# EAGLE board Lu_hw2 (EAGLE 7.5.0)
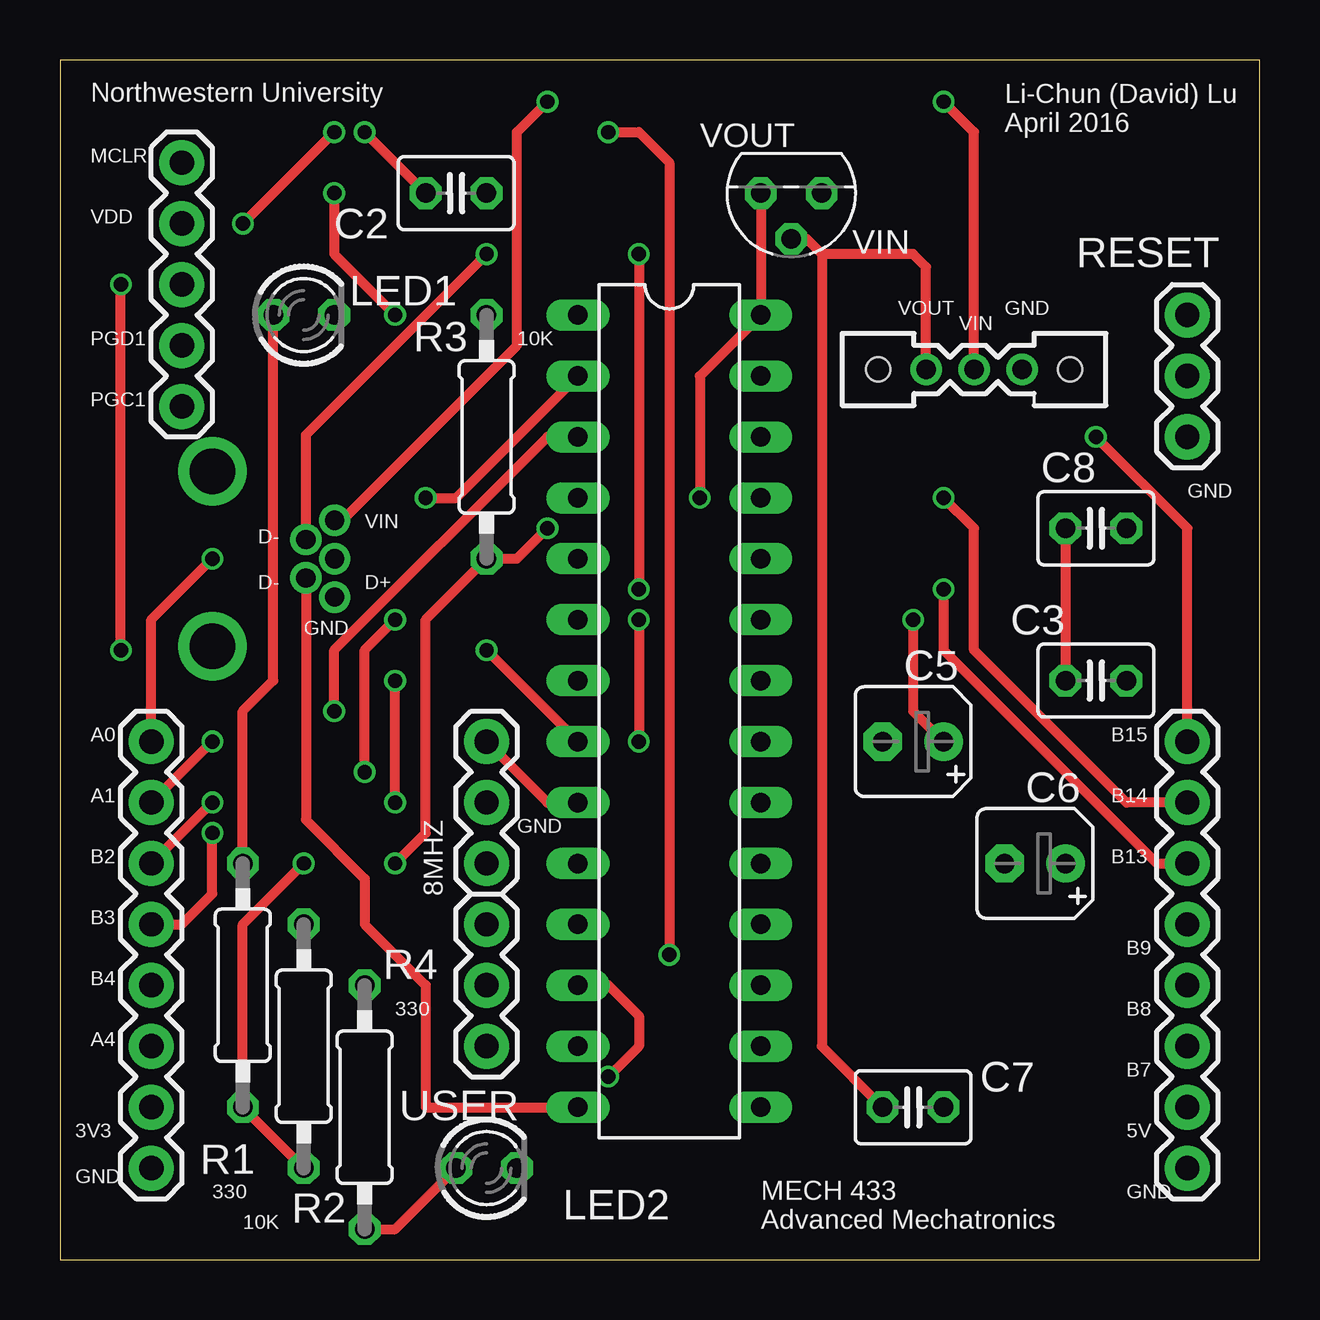
[diagram p0: board, top side]
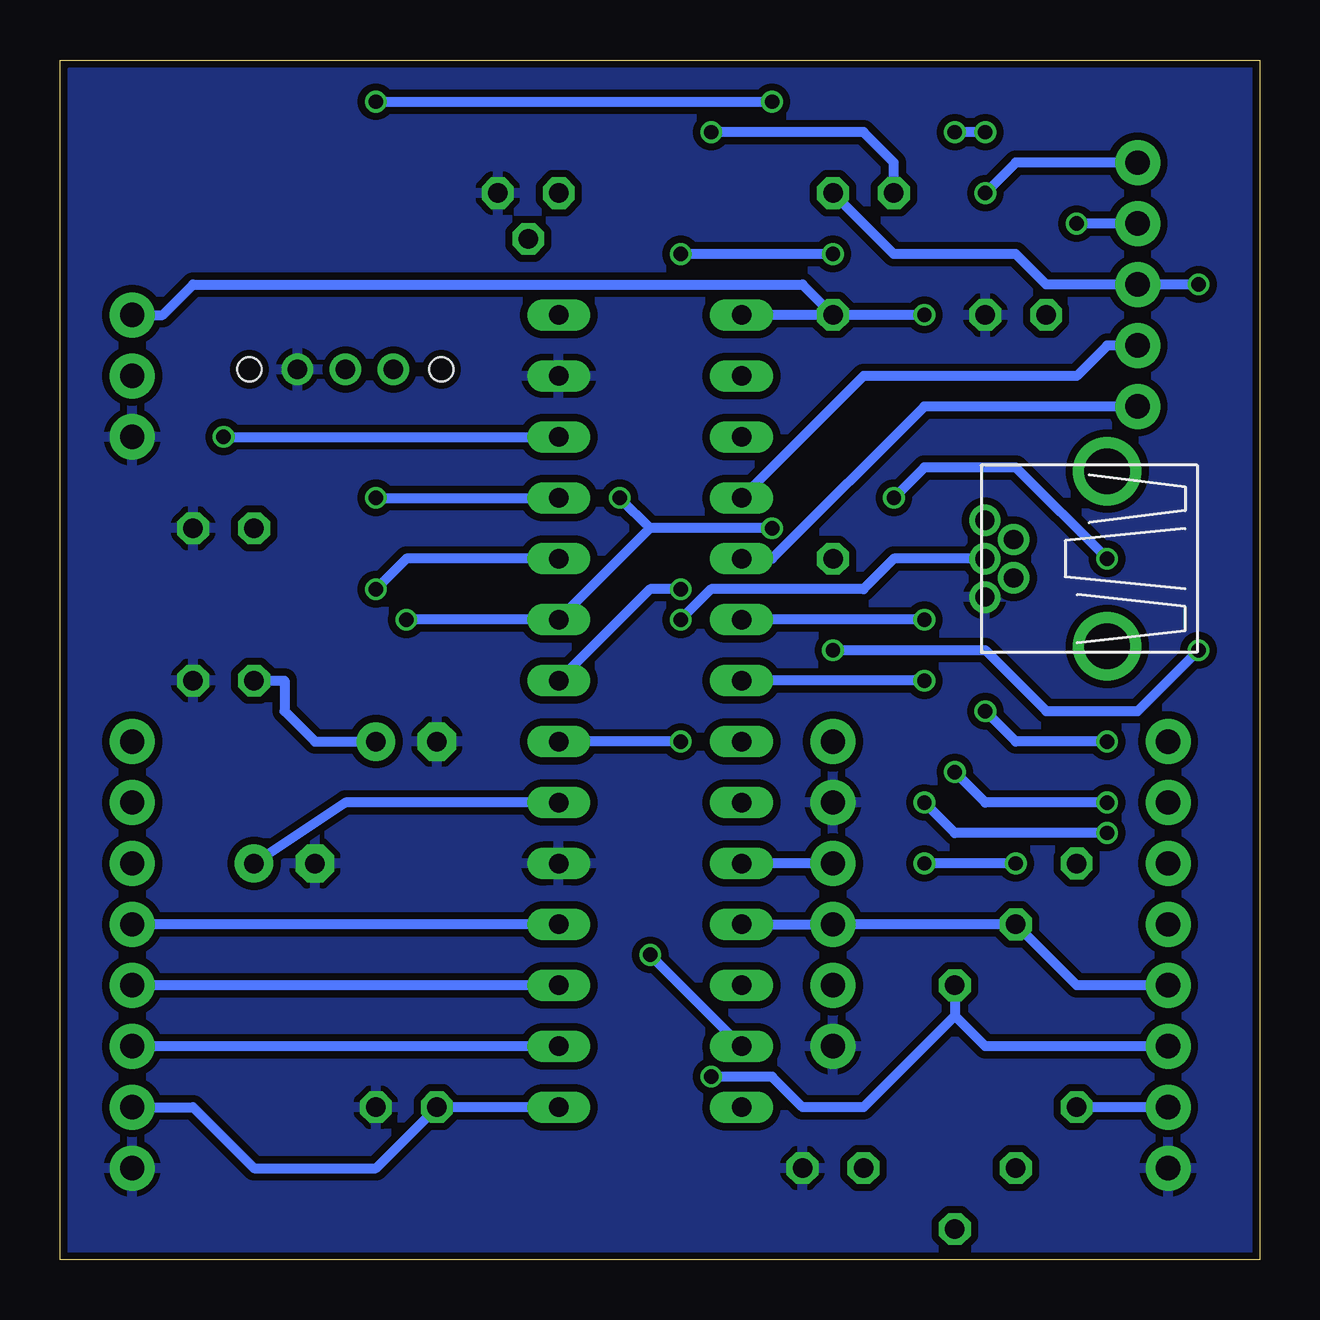
[diagram p1: board, bottom side, seen from below]

Size 50 x 50 mm. Coordinates in mm from the lower left corner, seen from the top.
Outline: 0,0 50,0 50,50 0,50 0,0
Copper layers (1*16): Top 0.035mm / dielectric 1.5mm / Bottom 0.035mm
Design rules "SeeedStudio_2layer_DRU_no_angle_20140221": minimum track width 6mil, minimum drill 12mil, track to track 6mil, track to pad 6mil, pad to pad 6mil, via to via 6mil, smd to smd 0mil, copper to edge 10mil, drill to drill 10mil, minimum pad ring 10mil, minimum via ring 6mil, stop-mask expansion 2mil, vias tented up to drill 100mil, thermal gap 10mil

## Footprints (pad centres in the part's own frame; a part is rotated, then mirrored left to right if it is on the bottom)
1X03 = drill 1.016 pad 1.88: 1 0,0; 2 2.54,0; 3 5.08,0
C025-030X050 = drill 0.813 octagon: 1 -1.27,0; 2 1.27,0
B45181A = drill 0.813 pad 1.6: + -1.27,0 | drill 0.813 pad 1.6 octagon: - 1.27,0
1X08_ROUND = drill 1.016 pad 1.88: 1 0,0; 2 2.54,0; 3 5.08,0; 4 7.62,0; 5 10.16,0; 6 12.7,0; 7 15.24,0; 8 17.78,0
USB-MB-H = drill 0.8: D+ 5.1,0; D- 3.9,0.8; GND 5.1,-1.6; ID 3.9,-0.8; VBUS 5.1,1.6 | drill 1.9: P$6 0,-3.65; P$7 0,3.65
1X05 = drill 1.016 pad 1.88: 1 0,0; 2 2.54,0; 3 5.08,0; 4 7.62,0; 5 10.16,0
LED3MM = drill 0.813 octagon: A -1.27,0; K 1.27,0
0207/10 = drill 0.813 octagon: 1 -5.08,0; 2 5.08,0
TO92 = drill 0.813 octagon: 1 -1.27,0; 2 0,1.905; 3 1.27,0
DIL28-3 = drill 0.813 long: 1 -16.51,-3.81; 2 -13.97,-3.81; 3 -11.43,-3.81; 4 -8.89,-3.81; 5 -6.35,-3.81; 6 -3.81,-3.81; 7 -1.27,-3.81; 8 1.27,-3.81; 9 3.81,-3.81; 10 6.35,-3.81; 11 8.89,-3.81; 12 11.43,-3.81; 13 13.97,-3.81; 14 16.51,-3.81; 15 16.51,3.81; 16 13.97,3.81; 17 11.43,3.81; 18 8.89,3.81; 19 6.35,3.81; 20 3.81,3.81; 21 1.27,3.81; 22 -1.27,3.81; 23 -3.81,3.81; 24 -6.35,3.81; 25 -8.89,3.81; 26 -11.43,3.81; 27 -13.97,3.81; 28 -16.51,3.81
SWITCH = drill 0.8: 1.GND 1,2; 2.VIN 1,0; 3.VOUT 1,-2 | hole 1: 1,-4; 1,4

## Placement (x,y rotation side)
8MHZ  [1X03]  17.78,16.51 90 top
C2  0.1uF  [C025-030X050]  16.51,44.45 180 top
C3  0.1uF  [C025-030X050]  43.18,24.13 0 top
C5  10uF  [B45181A]  35.56,21.59 180 top
C6  10uF  [B45181A]  40.64,16.51 180 top
C7  1uF  [C025-030X050]  35.56,6.35 0 top
C8  1uF  [C025-030X050]  43.18,30.48 0 top
J1  [1X08_ROUND]  3.81,3.81 90 top
J2  USB-MB-H  [USB-MB-H]  6.35,29.21 0 top
J3  [1X08_ROUND]  46.99,3.81 90 top
J5  [1X05]  5.08,45.72 270 top
LED1  [LED3MM]  10.16,39.37 0 top
LED2  [LED3MM]  17.78,3.81 0 top
R1  330  [0207/10]  7.62,11.43 90 top
R2  10K  [0207/10]  10.16,8.89 270 top
R3  10K  [0207/10]  17.78,34.29 90 top
R4  330  [0207/10]  12.7,6.35 270 top
RESET  [1X03]  46.99,34.29 90 top
U$1  MCP1702  [TO92]  30.48,44.45 180 top
U$2  PIC32  [DIL28-3]  25.4,22.86 270 top
U$3  [SWITCH]  38.1,38.1 270 top
USER  [1X03]  17.78,8.89 90 top

## Library data of the parts
8MHZ C2 C3 C5-C8 J2 J5 LED1 LED2 R1-R4 RESET U$1-U$3 USER = Lu_hw2
J1 J3 = Lu_hw2; PROD_ID: CONN-08437

## Nets
+3V3: C3.1 C5.+ C8.1 J1.2 R1.1 R2.2 R3.1 U$1.3 U$2.23 U$2.28
+5V: C7.1 J3.2 U$1.2 U$2.15 U$3.3.VOUT
A0: J1.8 U$2.2
A1: J1.7 U$2.3
A4: J1.3 R4.1 U$2.12
B2: J1.6 U$2.6
B3: J1.5 U$2.7
B4: J1.4 R2.1 U$2.11 USER.3
B5: J2.ID U$2.14
B7: J3.3 U$2.16
B8: J3.4 U$2.17
B9: J3.5 U$2.18
B13: J3.6 U$2.24
B14: J3.7 U$2.25
B15: J3.8 U$2.26
D+: J2.D+ U$2.21
D-: J2.D- U$2.22
GND: 8MHZ.2 C3.2 C5.- C6.- C7.2 C8.2 J1.1 J2.GND J3.1 LED1.K LED2.K RESET.1 U$1.1 U$2.19 U$2.27 U$3.1.GND USER.1
MCLR: J5.1 R3.2 RESET.3 U$2.1
N$1: J2.VBUS U$3.2.VIN
N$2: LED1.A R1.2
N$3: 8MHZ.3 U$2.9
N$4: LED2.A R4.2
N$5: 8MHZ.1 U$2.10
N$10: C6.+ U$2.20
PGC1: J5.5 U$2.5
PGD1: J5.4 U$2.4
VDD: C2.2 J5.2 U$2.13
VSS: C2.1 J5.3 U$2.8

## Tracks (layer width: path | path; a pad name or v marks a point on that pad's centre or on a via)
+3V3  (via drill 0.6)
  Top 0.406: C8.1 C3.1 | v35.56,26.67 35.56,22.86 C5.+ | U$1.3 U$2.28 26.67,36.83 v26.67,31.75 | R2.2 R1.1 7.62,13.97 v10.16,16.51 | v13.97,16.51 15.24,17.78 15.24,26.67 R3.1 19.05,29.21 v20.32,30.48
  Bottom 0.406: C3.1 40.64,24.13 40.64,22.86 39.37,21.59 C5.+ | v35.56,26.67 U$2.23 25.4,30.48 | J1.2 R1.1 | v10.16,16.51 v13.97,16.51 | v26.67,31.75 25.4,30.48 | v20.32,30.48 25.4,30.48
+5V
  Top 0.406: U$1.2 31.11,42.55 31.75,41.91 | 31.75,41.91 31.75,8.89 C7.1 | U$3.3.VOUT 36.1,41.37 35.56,41.91 31.75,41.91
  Bottom 0.406: J3.2 44.45,6.35 41.91,3.81 36.83,3.81 C7.1 U$2.15
A0  (via drill 0.6)
  Top 0.406: J1.8 3.81,26.67 v6.35,29.21 | v15.24,31.75 16.51,31.75 U$2.2
  Bottom 0.406: v6.35,29.21 10.16,33.02 13.97,33.02 v15.24,31.75
A1  (via drill 0.6)
  Top 0.406: J1.7 v6.35,21.59 | v11.43,22.86 11.43,25.4 20.32,34.29 U$2.3
  Bottom 0.406: v6.35,21.59 10.16,21.59 v11.43,22.86
A4  (via drill 0.6)
  Top 0.406: v22.86,7.62 24.13,8.89 24.13,10.16 22.86,11.43 U$2.12
  Bottom 0.406: R4.1 12.7,10.16 | 12.7,10.16 16.51,6.35 19.05,6.35 20.32,7.62 v22.86,7.62 | J1.3 11.43,8.89 12.7,10.16
B2  (via drill 0.6)
  Top 0.406: J1.6 v6.35,19.05 | v12.7,20.32 12.7,25.4 v13.97,26.67
  Bottom 0.406: v6.35,19.05 11.43,19.05 v12.7,20.32 | v13.97,26.67 U$2.6
B3  (via drill 0.6)
  Top 0.406: J1.5 5.08,13.97 6.35,15.24 v6.35,17.78 | v13.97,19.05 v13.97,24.13
  Bottom 0.406: v6.35,17.78 12.7,17.78 v13.97,19.05 | v13.97,24.13 U$2.7
B4
  Bottom 0.406: J1.4 7.62,11.43 R2.1 USER.3 U$2.11
B5
  Top 0.406: J2.ID 10.25,18.32 12.7,15.88 12.7,13.97 15.24,11.43 15.24,6.35 U$2.14
B7
  Bottom 0.406: U$2.16 J3.3
B8
  Bottom 0.406: U$2.17 J3.4
B9
  Bottom 0.406: U$2.18 J3.5
B13  (via drill 0.6)
  Top 0.406: v36.83,27.94 36.83,25.4 45.72,16.51 J3.6
  Bottom 0.406: U$2.24 35.56,29.21 v36.83,27.94
B14  (via drill 0.6)
  Top 0.406: v36.83,31.75 38.1,30.48 38.1,25.4 44.45,19.05 J3.7
  Bottom 0.406: v36.83,31.75 U$2.25
B15  (via drill 0.6)
  Top 0.406: J3.8 46.99,30.48 v43.18,34.29
  Bottom 0.406: v43.18,34.29 U$2.26
D+  (via drill 0.6)
  Top 0.406: v24.13,26.67 v24.13,21.59
  Bottom 0.406: J2.D+ 15.24,29.21 16.51,27.94 22.86,27.94 v24.13,26.67 | v24.13,21.59 U$2.21
D-  (via drill 0.6)
  Top 0.406: J2.D- 10.25,34.38 v17.78,41.91 | v24.13,41.91 v24.13,27.94
  Bottom 0.406: v17.78,41.91 v24.13,41.91 | v24.13,27.94 25.4,27.94 U$2.22
GND
  pour Bottom (isolate 0.305): 0,49.53 49.53,49.53 49.53,0 0,0
MCLR  (via drill 0.6)
  Top 0.406: v11.43,44.45 11.43,41.91 v13.97,39.37
  Bottom 0.406: R3.2 U$2.1 | RESET.3 45.72,39.37 44.45,40.64 19.05,40.64 R3.2 | J5.1 10.16,45.72 v11.43,44.45 | v13.97,39.37 R3.2
N$1  (via drill 0.6)
  Top 0.406: J2.VBUS 11.76,30.81 19.05,38.1 19.05,46.99 v20.32,48.26 | U$3.2.VIN 38.1,46.99 v36.83,48.26
  Bottom 0.406: v36.83,48.26 v20.32,48.26
N$2
  Top 0.406: R1.2 7.62,22.86 8.89,24.13 LED1.A
N$3
  Top 0.406: U$2.9 20.32,19.05 8MHZ.3
N$4
  Top 0.406: R4.2 13.97,1.27 LED2.A
N$5
  Bottom 0.406: 8MHZ.1 U$2.10
N$10
  Bottom 0.406: U$2.20 38.1,19.05 C6.+
PGC1
  Bottom 0.406: J5.5 13.97,35.56 20.32,29.21 U$2.5
PGD1
  Bottom 0.406: J5.4 6.35,38.1 7.62,36.83 16.51,36.83 U$2.4
VDD  (via drill 0.6)
  Top 0.406: v7.62,43.18 v11.43,46.99 | v12.7,46.99 C2.2 | v22.86,46.99 24.13,46.99 25.4,45.72 v25.4,12.7
  Bottom 0.406: J5.2 v7.62,43.18 | v11.43,46.99 v12.7,46.99 | C2.2 15.24,45.72 16.51,46.99 v22.86,46.99 | U$2.13 v25.4,12.7
VSS  (via drill 0.6)
  Top 0.406: U$2.8 v17.78,25.4 | v2.54,25.4 v2.54,40.64
  Bottom 0.406: C2.1 15.24,41.91 10.16,41.91 8.89,40.64 J5.3 v2.54,40.64 | v17.78,25.4 11.43,25.4 8.89,22.86 5.08,22.86 v2.54,25.4

## Text on the board
tPlace: Northwestern University | Li-Chun (David) Lu / April 2016 | MCLR | VOUT | VDD | VIN | VOUT | VIN | GND | PGD1 | 10K | PGC1 | GND | D- | VIN | D- | D+ | GND | A0 | B15 | A1 | B14 | GND | B2 | B13 | B3 | B9 | B4 | 330 | B8 | A4 | B7 | 3V3 | 5V | GND | 330 | GND | 10K | MECH 433 / Advanced Mechatronics